# EAGLE board projet_groupe_5 (EAGLE 9.7.0)

Size 349.37 x 139.35 mm. Coordinates in mm from the lower left corner, seen from the top.
Outline: 0,0 349.37,0 349.37,139.34 0,139.34 0,0
Copper layers (1*16): Top 0.035mm / dielectric 1.5mm / Bottom 0.035mm
Design rules "default": minimum track width 6mil, minimum drill 0.35mm, track to track 6mil, track to pad 6mil, pad to pad 6mil, via to via 6mil, smd to smd 6mil, copper to edge 40mil, drill to drill 6mil, minimum pad ring 10mil, minimum via ring 8mil, stop-mask expansion 4mil, vias tented up to drill 0mil, thermal gap 10mil

## Footprints (pad centres in the part's own frame; a part is rotated, then mirrored left to right if it is on the bottom)
LEDRD254W60D565H860B = drill 0.981 pad 1.581: 1 -1.27,0; 2 1.27,0
MQ-XX-SOCKET = drill 1.27: 1 -6.223,6.223; 2 -8.788,0; 3 -6.223,-6.223; 4 6.223,-6.223; 5 8.788,0; 6 6.223,6.223
LU-5-R = drill 0.8: 1 -6.35,-3.81; 5 3.81,-3.81; 6 6.35,-3.81; 7 6.35,3.81; 8 3.81,3.81; 12 -6.35,3.81
MOTOR = drill 1.118 pad 3.15 octagon: + 2.54,0; - -2.54,0
BATTERY-GENERIC = drill 1.118 pad 3.15 octagon: + 2.54,0; - -2.54,0
PIEZO = drill 1 pad 1.6: 1 -3.5,0; 2 3.5,0
RESAD1016W63L850D250B = drill 0.83 pad 1.43: 1 -5.08,0; 2 5.08,0
SEN-13322 = drill 1.016 long: 1 -2.54,0; 2 0,0; 3 2.54,0
SG90 = drill 1.016 long: 1 -2.54,0; 2 0,0; 3 2.54,0
ARDUINO-UNO-R3-SHIELD = drill 1.016 pad 1.88: 3.3V 24.13,-2.54; 5V 24.13,0; A0 24.13,12.7; A1 24.13,15.24; A2 24.13,17.78; A3 24.13,20.32; A4 24.13,22.86; A5 24.13,25.4; AREF -24.13,-13.97; D2 -24.13,20.32; D3 -24.13,17.78; D4 -24.13,15.24; D5 -24.13,12.7; D6 -24.13,10.16; D7 -24.13,7.62; D8 -24.13,3.81; D9 -24.13,1.27; D10 -24.13,-1.27; D11 -24.13,-3.81; D12 -24.13,-6.35; D13 -24.13,-8.89; GND@0 24.13,2.54; GND@1 24.13,5.08; GND@2 -24.13,-11.43; IOREF 24.13,-7.62; NC 24.13,-10.16; RES 24.13,-5.08; RX -24.13,25.4; SCL -24.13,-19.05; SDA -24.13,-16.51; TX -24.13,22.86; VIN 24.13,7.62
LCD-I2C = drill 1.016 long: 1 -19.05,-5.08; 2 -19.05,-7.62; 3 -19.05,-10.16; 4 -19.05,-12.7

## Placement (x,y rotation side)
D1  RED  [LEDRD254W60D565H860B]  198.77,44.23 180 top
GAS1  GAS-SENSORMQ-XX-SOCKET  [MQ-XX-SOCKET]  261.7,37.91 270 top
K1  RELAY-SPDT_LU-5-R  [LU-5-R]  221.01,99.62 180 top
K2  RELAY-SPDT_LU-5-R  [LU-5-R]  260.15,99.62 180 top
MVENTILATEUR_IN  MOTOR_HDR  [MOTOR]  216.67,118.15 0 top
MVENTILATEUR_OUT  MOTOR_HDR  [MOTOR]  258.23,117.49 0 top
P1  BATTERYGENERIC  [BATTERY-GENERIC]  341.11,91.28 180 top
PIEZO1  PIEZO  [PIEZO]  123.18,101.14 0 top
R1  1k  [RESAD1016W63L850D250B]  240.68,34.07 90 top
R2  1k  [RESAD1016W63L850D250B]  197.5,34.07 90 top
SEN2  SEN-13322  [SEN-13322]  304.94,7.62 0 top
SERVOROBINET  SERVOSG90  [SG90]  177.11,97.33 180 top
U1  ARDUINO-UNO-R3-SHIELD  [ARDUINO-UNO-R3-SHIELD]  105.11,54.09 270 top
U2  LCD-16X2-I2CSUNFOUNDER-IIC  [LCD-I2C]  30.73,131.8 0 top

## Library data of the parts
D1 = Tinkercad; CATEGORY: Opto-Electronic; SUB-CATEGORY: LED; VALUE: LED_RED
GAS1 K1 K2 MVENTILATEUR_IN MVENTILATEUR_OUT P1 PIEZO1 R1 R2 SEN2 SERVOROBINET U1 U2 = Tinkercad

## Nets
D1_C: D1.2 R2.2
MVENTILATEUR_OUT_-: K2.7 MVENTILATEUR_OUT.-
P1+: MVENTILATEUR_IN.+ MVENTILATEUR_OUT.+ P1.+
P1-: K1.1 K2.1 P1.-
U1_5V: GAS1.4 GAS1.5 GAS1.6 SERVOROBINET.2 U1.5V U2.2 U2.3
U1_A0: U1.A0 U2.2
U1_A1: SEN2.3 U1.A1
U1_A2: SEN2.1 U1.A2
U1_A3: GAS1.1 GAS1.3 R1.2 U1.A3
U1_A4: U1.A4 U2.3
U1_A5: U1.A5 U2.4
U1_D2: PIEZO1.1 U1.D2
U1_D3: SERVOROBINET.3 U1.D3
U1_D5: K2.5 U1.D5
U1_D6: K1.5 U1.D6
U1_D13: D1.1 U1.D13
U1_GND: GAS1.2 K1.7 K1.8 K2.8 MVENTILATEUR_IN.- PIEZO1.2 R1.1 R2.1 SEN2.2 SERVOROBINET.1 U1.GND@0 U1.GND@1 U1.GND@2 U2.1

## Tracks (layer width: path | path; a pad name or v marks a point on that pad's centre or on a via)
D1_C  (1 unrouted)
MVENTILATEUR_OUT_-  (1 unrouted)
P1+  (2 unrouted)
P1-  (2 unrouted)
U1_5V  (6 unrouted)
U1_A0  (1 unrouted)
U1_A1  (1 unrouted)
U1_A2  (1 unrouted)
U1_A3  (3 unrouted)
U1_A4  (1 unrouted)
U1_A5  (1 unrouted)
U1_D2  (1 unrouted)
U1_D3  (1 unrouted)
U1_D5  (1 unrouted)
U1_D6  (1 unrouted)
U1_D13  (1 unrouted)
U1_GND  (14 unrouted)